# EAGLE board can-udp-bridge (EAGLE 7.2.0)
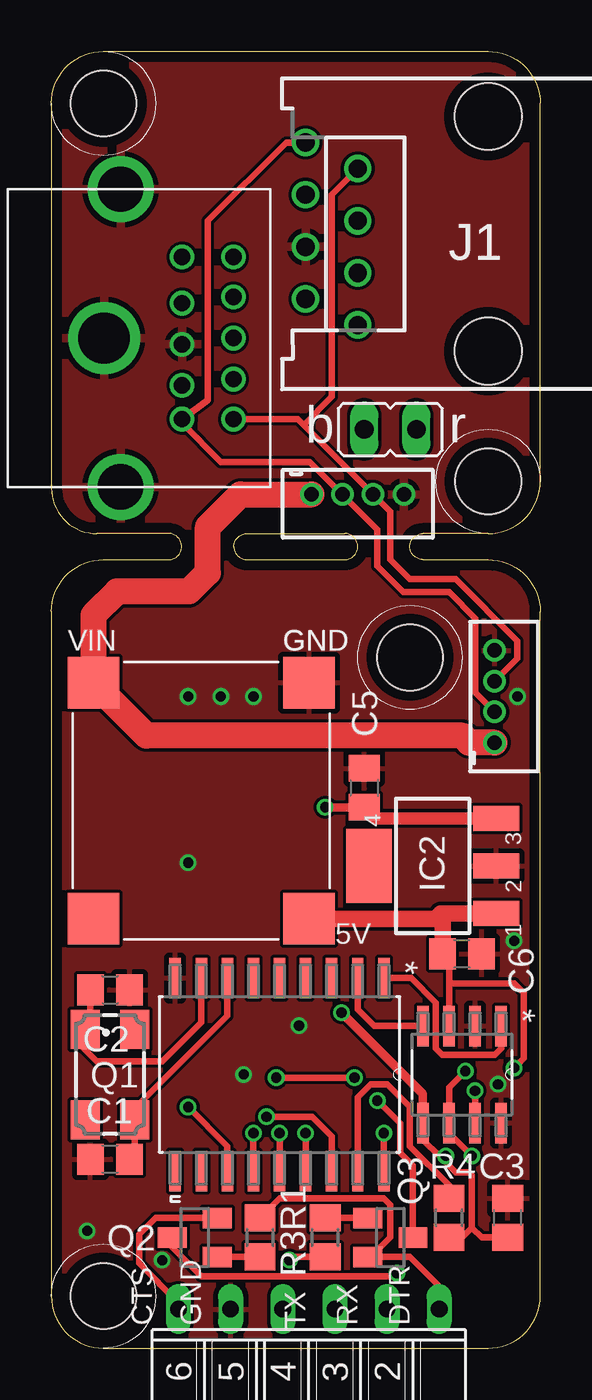
[diagram p0: board, top side]
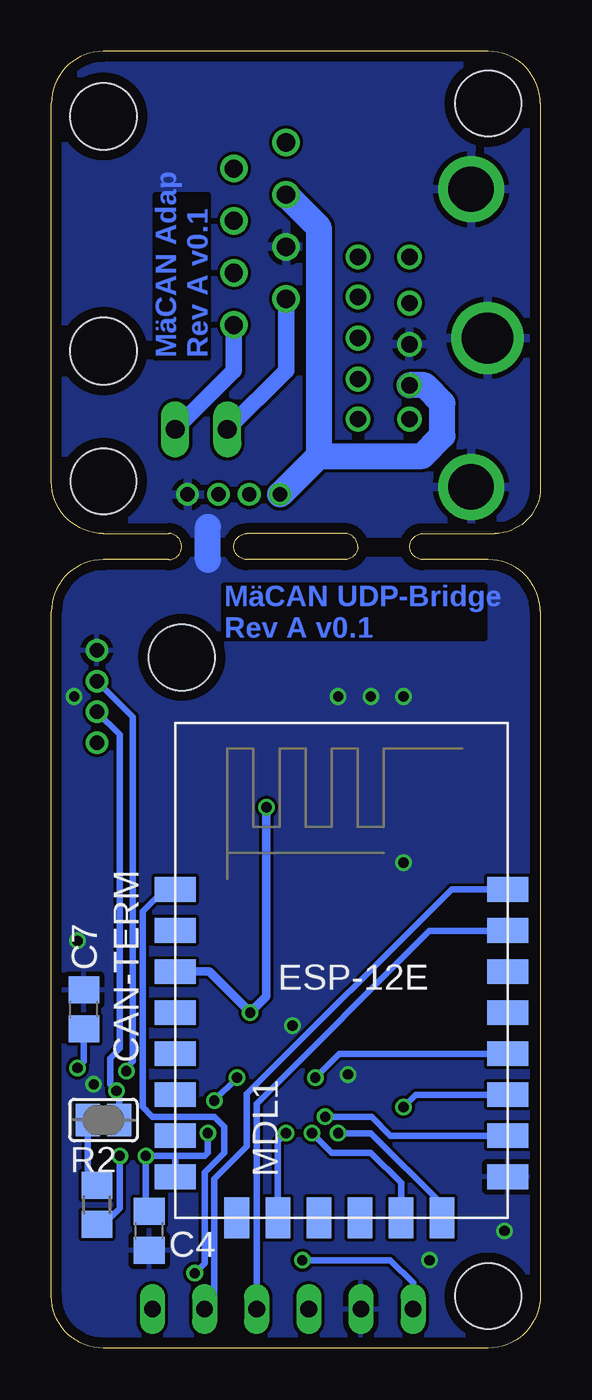
[diagram p1: board, bottom side, seen from below]

Size 23.81 x 63.18 mm. Coordinates in mm from the lower left corner, seen from the top.
Outline: 2.54,0 21.27,0 arc90 23.81,2.54 23.81,35.88 arc90 21.27,38.42 18.1,38.42 arc-90 17.46,39.05 arc-90 18.1,39.69 21.27,39.69 arc90 23.81,42.23 23.81,60.64 arc90 21.27,63.18 2.54,63.18 arc90 0,60.64 0,41.91 arc90 2.22,39.69 5.71,39.69 arc-90 6.35,39.05 arc-90 5.71,38.42 2.54,38.42 arc90 0,35.88 0,2.54 arc90 2.54,0
Outline: 9.53,39.69 14.29,39.69 arc-90 14.92,39.05 arc-90 14.29,38.42 9.53,38.42 arc-90 8.89,39.05 arc-90 9.53,39.69
Copper layers (1*16): Top 0.035mm / dielectric 1.6mm / Bottom 0.035mm
Design rules "Elecrow_2-layer_PCB_eagle_rule": minimum track width 6mil, minimum drill 12mil, track to track 6mil, track to pad 6mil, pad to pad 6mil, via to via 8mil, smd to smd 0mil, copper to edge 20mil, drill to drill 10mil, minimum pad ring 6mil, minimum via ring 6mil, stop-mask expansion 0mil, vias tented up to drill 100mil, thermal gap 10mil
Holes 3.2 mm at 2.54,2.54 17.46,33.66 21.27,42.23 2.54,60.64

## Footprints (pad centres in the part's own frame; a part is rotated, then mirrored left to right if it is on the bottom)
C0805 = smd 1.3 x 1.5: 1 -0.95,0; 2 0.95,0
SJ = smd 1.168 x 1.6: 1 -0.762,0; 2 0.762,0
SOT223 = smd 1.219 x 2.235: 1 -2.311,-3.099; 2 0,-3.099; 3 2.311,-3.099 | smd 3.6 x 2.2: 4 0,3.099
215877-7 = drill 0.889: 1 -4.445,6.35; 2 -3.175,8.89; 3 -1.905,6.35; 4 -0.635,8.89; 5 0.635,6.35; 6 1.905,8.89; 7 3.175,6.35; 8 4.445,8.89 | hole 3.251: -5.715,0; 5.715,0
ESP8266-ESP12E = smd 2 x 1.2: 1 0,16; 2 0,14; 3 0,12; 4 0,10; 5 0,8; 6 0,6; 7 0,4; 8 0,2; 9 16.2,2; 10 16.2,4; 11 16.2,6; 12 16.2,8; 13 16.2,10; 14 16.2,12; 15 16.2,14; 16 16.2,16 | smd 1.2 x 2: 17 3,0; 18 5,0; 19 7,0; 20 9,0; 21 11,0; 22 13,0
FE06W = drill 0.813 long: 1 -6.35,0; 2 -3.81,0; 3 -1.27,0; 4 1.27,0; 5 3.81,0; 6 6.35,0
CTS406 = smd 1.9 x 1.4: 1 -2.2,-1.2; 2 2.2,-1.2; 3 2.2,1.2; 4 -2.2,1.2
SOT23 = smd 1 x 1.4: 1 -0.95,-1.1; 2 0.95,-1.1; 3 0,1.1
R0805 = smd 1.3 x 1.5: 1 -0.95,0; 2 0.95,0
JP1 = drill 0.914 long: 1 0,-1.27; 2 0,1.27
SOIC127P1034X264-18N = smd 1.981 x 0.559: 1 -4.699,5.08; 2 -4.699,3.81; 3 -4.699,2.54; 4 -4.699,1.27; 5 -4.699,0; 6 -4.699,-1.27; 7 -4.699,-2.54; 8 -4.699,-3.81; 9 -4.699,-5.08; 10 4.699,-5.08; 11 4.699,-3.81; 12 4.699,-2.54; 13 4.699,-1.27; 14 4.699,0; 15 4.699,1.27; 16 4.699,2.54; 17 4.699,3.81; 18 4.699,5.08
SOIC127P600X175-8N = smd 1.981 x 0.559: 1 -2.362,1.905; 2 -2.362,0.635; 3 -2.362,-0.635; 4 -2.362,-1.905; 5 2.362,-1.905; 6 2.362,-0.635; 7 2.362,0.635; 8 2.362,1.905
ROF-78EXX-0.5SMD = smd 2.5 x 2.5: 1 -5.25,5.75; 2 5.25,5.75; 3 5.25,-5.75; 4 -5.25,-5.75
MARKLIN-MD-10-PRINT = drill 0.8 pad 1.1: 1 -2.3,1.25; 2 -0.3,1.25; 3 1.7,1.25; 4 -3.95,1.25; 5 -2,-1.25; 6 0,-1.25; 7 3.95,1.25; 8 -3.95,-1.25; 9 2,-1.25; 10 3.95,-1.25 | drill 2.5 pad 2.8: GND1 0,5.05 | drill 2.2 pad 2.5: GND2 7.25,4.25; GND3 -7.25,4.25
B4B-ZR = drill 0.7 pad 1.1: 1 -2.25,0; 2 -0.75,0; 3 0.75,0; 4 2.25,0

## Placement (x,y rotation side)
C1  22p  [C0805]  2.86,9.21 180 top
C2  22p  [C0805]  2.86,17.46 0 top
C3  100n  [C0805]  22.23,6.35 90 top
C4  100n  [C0805]  19.05,5.71 90 bottom
C5  1µ  [C0805]  15.24,27.3 270 top
C6  1µ  [C0805]  20,19.21 180 top
C7  100n  [C0805]  22.23,16.51 90 bottom
CAN-TERM  [SJ]  21.27,11.11 180 bottom
IC2  MCP1703DB  [SOT223]  18.57,23.49 90 top
J1  [215877-7]  21.27,54.29 90 top
MDL1  [ESP8266-ESP12E]  17.78,6.35 0 bottom
PROG/TTL  [FE06W]  12.54,1.91 180 top
Q1  16M  [CTS406]  2.86,13.34 270 top
Q2  [SOT23]  6.98,5.4 90 top
Q3  [SOT23]  16.51,5.4 270 top
R1  12k  [R0805]  13.33,5.4 90 top
R2  120R  [R0805]  21.59,6.98 90 bottom
R3  12k  [R0805]  10.16,5.4 270 top
R4  12k  [R0805]  19.37,6.35 90 top
TRACK  [JP1]  16.51,44.77 90 top
U$1  MCP2515-I/SO  [SOIC127P1034X264-18N]  11.11,13.34 270 top
U$2  MCP2562  [SOIC127P600X175-8N]  20,13.34 270 top
U$3  ROF-78E5.0-0.5SMD  [ROF-78EXX-0.5SMD]  7.3,26.67 0 top
U$4  MARKLIN-MD-10  [MARKLIN-MD-10-PRINT]  7.62,49.21 90 top
X1  B4B-ZR  [B4B-ZR]  21.59,31.75 90 top
X3  B4B-ZR  [B4B-ZR]  14.92,41.59 0 top

## Library data of the parts
C1-C7 R1-R4 = rcl
CAN-TERM TRACK = jumper
IC2 = linear
J1 = con-amp
MDL1 = ESP8266-ESP12E
PROG/TTL = con-lsta; OC_FARNELL: unknown; OC_NEWARK: unknown
Q1 = crystal; OC_FARNELL: unknown; OC_NEWARK: unknown
Q2 Q3 = semicon-smd-ipc
U$1 = Microchip_By_element14_Batch_1; MPN: MCP2515-I/SO; OC_FARNELL: 1292239; OC_NEWARK: 29H7136; PACKAGE: SOIC-18; SUPPLIER: Microchip
U$2 = Microchip_By_element14_Batch_1; DESCRIPTION: High-Speed CAN Transceiver; MPN: MCP2551-E/SN; OC_FARNELL: 1467746; OC_NEWARK: 92C4186; PACKAGE: SOIC-8; SUPPLIER: Microchip
U$3 = ROF-78XX
U$4 = Marklin-Mini-DIN
X1 X3 = con-jst; MF: FARNELL; MPN: B4B-ZR(LF)(SN); OC_FARNELL: 1830916; OC_NEWARK: 37K9960

## Nets
+3V3: C3.1 C4.2 C5.2 IC2.3 MDL1.3 MDL1.8 R4.1 U$1.18 U$2.5
+5V: C6.2 C7.1 IC2.1 U$2.3 U$3.3
+18V: J1.6 U$3.1 U$4.1 X1.1 X3.1
CAN_H: CAN-TERM.1 J1.8 U$2.7 U$4.4 X1.2 X3.2
CAN_L: J1.7 R2.1 U$2.6 U$4.8 X1.3 X3.3
DTR: PROG/TTL.1 Q3.2 R3.1
GND: C1.2 C2.2 C3.2 C4.1 C5.1 C6.1 C7.2 IC2.2 J1.4 MDL1.9 PROG/TTL.5 U$1.9 U$2.2 U$2.8 U$3.2 U$4.2 U$4.GND1 U$4.GND2 U$4.GND3 X1.4 X3.4
N$1: U$1.1 U$2.1
N$2: U$1.2 U$2.4
N$3: PROG/TTL.6 Q2.2 R1.1
N$4: MDL1.1 Q2.3
N$5: MDL1.18 U$1.15
N$6: MDL1.10 U$1.16
N$7: MDL1.21 U$1.14
N$8: MDL1.11 U$1.12
N$9: MDL1.22 U$1.13
N$10: MDL1.12 Q3.3
N$11: Q3.1 R1.2
N$12: Q2.1 R3.2
N$13: C1.1 Q1.3 U$1.7
N$14: C2.1 Q1.1 U$1.8
N$15: CAN-TERM.2 R2.2
N$16: MDL1.16 PROG/TTL.2
N$17: MDL1.15 PROG/TTL.3
N$18: J1.2 TRACK.2
N$19: J1.1 TRACK.1
N$20: R4.2 U$1.17

## Tracks (layer width: path | path; a pad name or v marks a point on that pad's centre or on a via)
+3V3  (via drill 0.5, 0.5 pad 0.25)
  Top 0.305: C5.2 | 16.19,14.29 16.83,13.65 | U$1.18 v16.19,10.48 | U$2.5 18.1,10.16 18.89,9.37 v19.21,9.37 19.21,9.05 19.69,8.57 20.32,8.57 20.48,8.41 20.48,5.87 | 19.69,5.4 R4.1 20.01,5.4 20.48,5.87 | C3.1 20.95,5.4 20.48,5.87
  Top 0.406: U$2.5 18.1,12.38 16.83,13.65 v14.13,16.35 | C5.2 v13.33,26.36 v13.33,26.35
  Top 0.61: IC2.3 15.79,25.81 C5.2
  Bottom 0.305: 17.15,8.26 17.69,8.26 MDL1.8 17.78,9.37 | 17.78,9.37 16.35,9.37 16.19,9.53 v16.19,10.48 | 17.78,9.37 v19.21,9.37 19.21,7.14 19.05,6.98 C4.2
  Bottom 0.406: v13.33,26.35 13.33,17.14 v14.13,16.35 16.13,18.35 MDL1.3
+5V  (via drill 0.5)
  Top 0.305: 19.37,17.78 19.37,19.37 | U$2.3 19.37,17.78 | 19.37,17.78 22.54,17.78 23.02,17.3 23.02,14.13 v22.54,13.65
  Top 0.406: 19.37,19.37 C6.2
  Top 0.813: IC2.1 19.05,21.18 | C6.2 19.05,21.18 | U$3.3 18.7,20.92 18.96,21.18 19.05,21.18
  Bottom 0.305: C7.1 22.23,13.97 v22.54,13.65
+18V
  Top 1.27: X3.1 9.21,41.59 7.62,40.01 7.62,37.78 6.7,36.87 3.21,36.87 2.05,35.71 U$3.1 4.63,29.84 20,29.84 20.35,29.5 X1.1
  Bottom 1.27: J1.6 10.79,54.61 10.79,43.47 | 10.79,43.47 5.74,43.47 4.76,44.45 4.76,46.04 5.64,46.91 U$4.1 | 10.79,43.47 X3.1
CAN_H  (via drill 0.5)
  Top 0.305: U$2.7 v20.64,12.54 | X1.2 20.64,31.95 20.64,35.56 19.37,36.83 17.15,36.83 15.87,38.1 15.87,39.89 X3.2 12.58,43.18 8.26,43.18 6.37,45.06 U$4.4 7.62,46.19 7.62,54.93 11.43,58.74 J1.8
  Bottom 0.305: CAN-TERM.1 20.51,12.41 v20.64,12.54 20.95,12.86 20.95,14.13 20.48,14.6 20.48,29.89 X1.2
CAN_L  (via drill 0.5, 0.5 pad 0.25)
  Top 0.305: v20.16,13.49 19.37,12.7 U$2.6 19.37,10.48 v20.48,9.37 | 12.28,44.98 12,45.26 U$4.8 | J1.7 13.65,56.2 13.65,46.36 12.28,44.98 | X1.3 22.7,33.61 22.7,34.45 19.69,37.47 17.46,37.47 16.51,38.42 16.51,40.76 X3.3 12.28,44.98
  Bottom 0.305: X1.3 19.84,30.75 19.84,13.97 20.16,13.65 v20.16,13.49 | R2.1 21.59,5.72 20.48,6.83 v20.48,9.37
DTR
  Top 0.305: PROG/TTL.1 18.89,3.02 17.46,4.44 15.56,4.44 | Q3.2 15.56,4.44 | 15.56,4.44 16.51,5.4 16.51,6.98 16.19,7.3 11.12,7.3 R3.1
GND  (via drill 0.5, 0.5 pad 0.25)
  Bottom 1.27: 16.19,38.42 16.19,40.01
  other vias: 22.54,19.84 22.7,31.75 6.67,23.65 12.06,15.72 8.26,31.75 9.84,31.75 6.67,31.75 9.37,13.34 5.4,4.29 1.75,5.71 21.75,12.86
  pour Top: -0.32,38.42 24.13,38.42 24.13,0.32 -0.32,0.32
  pour Bottom: -0.32,38.42 24.13,38.42 24.13,0.32 -0.32,0.32
  pour Top: 0,63.18 23.81,63.18 23.81,39.69 0,39.69
  pour Bottom: 23.81,39.69 0,39.69 0,63.18 23.81,63.18
N$1
  Top 0.305: U$2.1 21.91,14.6 21.59,14.29 19.05,14.29 18.73,14.6 18.73,16.83 17.53,18.03 U$1.1
N$2
  Top 0.305: U$2.4 15.74,15.7 14.92,16.51 U$1.2
N$3  (via drill 0.5 pad 0.25)
  Top 0.305: PROG/TTL.6 6.19,2.22 4.29,4.13 4.29,5.56 5.08,6.35 Q2.2 | R1.1 11.75,4.45 v11.59,4.29
  Bottom 0.305: PROG/TTL.6 6.19,3.17 7.3,4.29 v11.59,4.29
N$4  (via drill 0.5 pad 0.25)
  Top 0.305: Q2.3 5.88,4.91 7.3,3.49 16.67,3.49 v16.83,3.65
  Bottom 0.305: v16.83,3.65 16.35,4.13 16.35,8.57 15.4,9.53 15.4,10.8 15.87,11.27 18.89,11.27 19.37,11.75 19.37,21.27 18.41,22.23 17.91,22.23 MDL1.1
N$5  (via drill 0.5 pad 0.25)
  Top 0.305: U$1.15 v12.38,10.48
  Bottom 0.305: MDL1.18 12.78,10.08 v12.38,10.48
N$6  (via drill 0.5 pad 0.25)
  Top 0.305: v10.48,11.27 12.7,11.27 13.65,10.32 U$1.16
  Bottom 0.305: v10.48,11.27 8.22,11.27 7.29,10.35 MDL1.10
N$7  (via drill 0.5 pad 0.25)
  Top 0.305: U$1.14 v11.11,10.48
  Bottom 0.305: MDL1.21 6.78,8.05 8.26,9.53 10.16,9.53 v11.11,10.48
N$8  (via drill 0.5)
  Top 0.305: v6.67,11.75 8.57,9.84 U$1.12
  Bottom 0.305: MDL1.11 6.06,12.35 v6.67,11.75
N$9  (via drill 0.5 pad 0.25)
  Top 0.305: U$1.13 v9.84,10.48
  Bottom 0.305: MDL1.22 4.78,7 8.26,10.48 v9.84,10.48
N$10  (via drill 0.5)
  Top 0.305: Q3.3 17.61,8.9 16.99,9.53 16.99,10.95 v15.87,12.07 | v14.76,13.18 v10.95,13.18
  Bottom 0.305: v15.87,12.07 v14.76,13.18 | MDL1.12 9.78,14.35 v10.95,13.18
N$11
  Top 0.305: Q3.1 R1.2
N$12
  Top 0.305: Q2.1 R3.2
N$13
  Top 0.305: C1.1 4.06,9.46 Q1.3 4.13,11.21 4.13,11.75 8.57,16.19 U$1.7
N$14
  Top 0.305: C2.1 1.91,15.78 Q1.1 1.59,15.46 1.59,14.6 2.22,13.97 5.4,13.97 7.3,15.87 U$1.8
N$15
  Bottom 0.305: CAN-TERM.2 22.03,8.13 R2.2
N$16
  Bottom 0.305: PROG/TTL.2 15.87,2.38 15.87,8.26 14.29,9.84 14.29,12.38 4.32,22.35 MDL1.16
N$17
  Bottom 0.305: PROG/TTL.3 13.81,11.91 5.4,20.32 1.61,20.32 MDL1.15
N$18
  Bottom 0.813: J1.2 12.38,47.62 TRACK.2
N$19
  Bottom 0.813: J1.1 14.92,47.62 TRACK.1
N$20
  Top 0.305: U$1.17 14.92,12.22 15.56,12.86 16.35,12.86 17.46,11.75 17.46,9.84 19.37,7.94 R4.2

## Text on the board
Bottom: MäCAN Adap / Rev A v0.1 | MäCAN UDP-Bridge / Rev A v0.1
tNames: b | r | VIN | GND | GND | 5V | CTS | GND | RX | DTR | TX